# EAGLE board untitled (EAGLE 9.1.2)
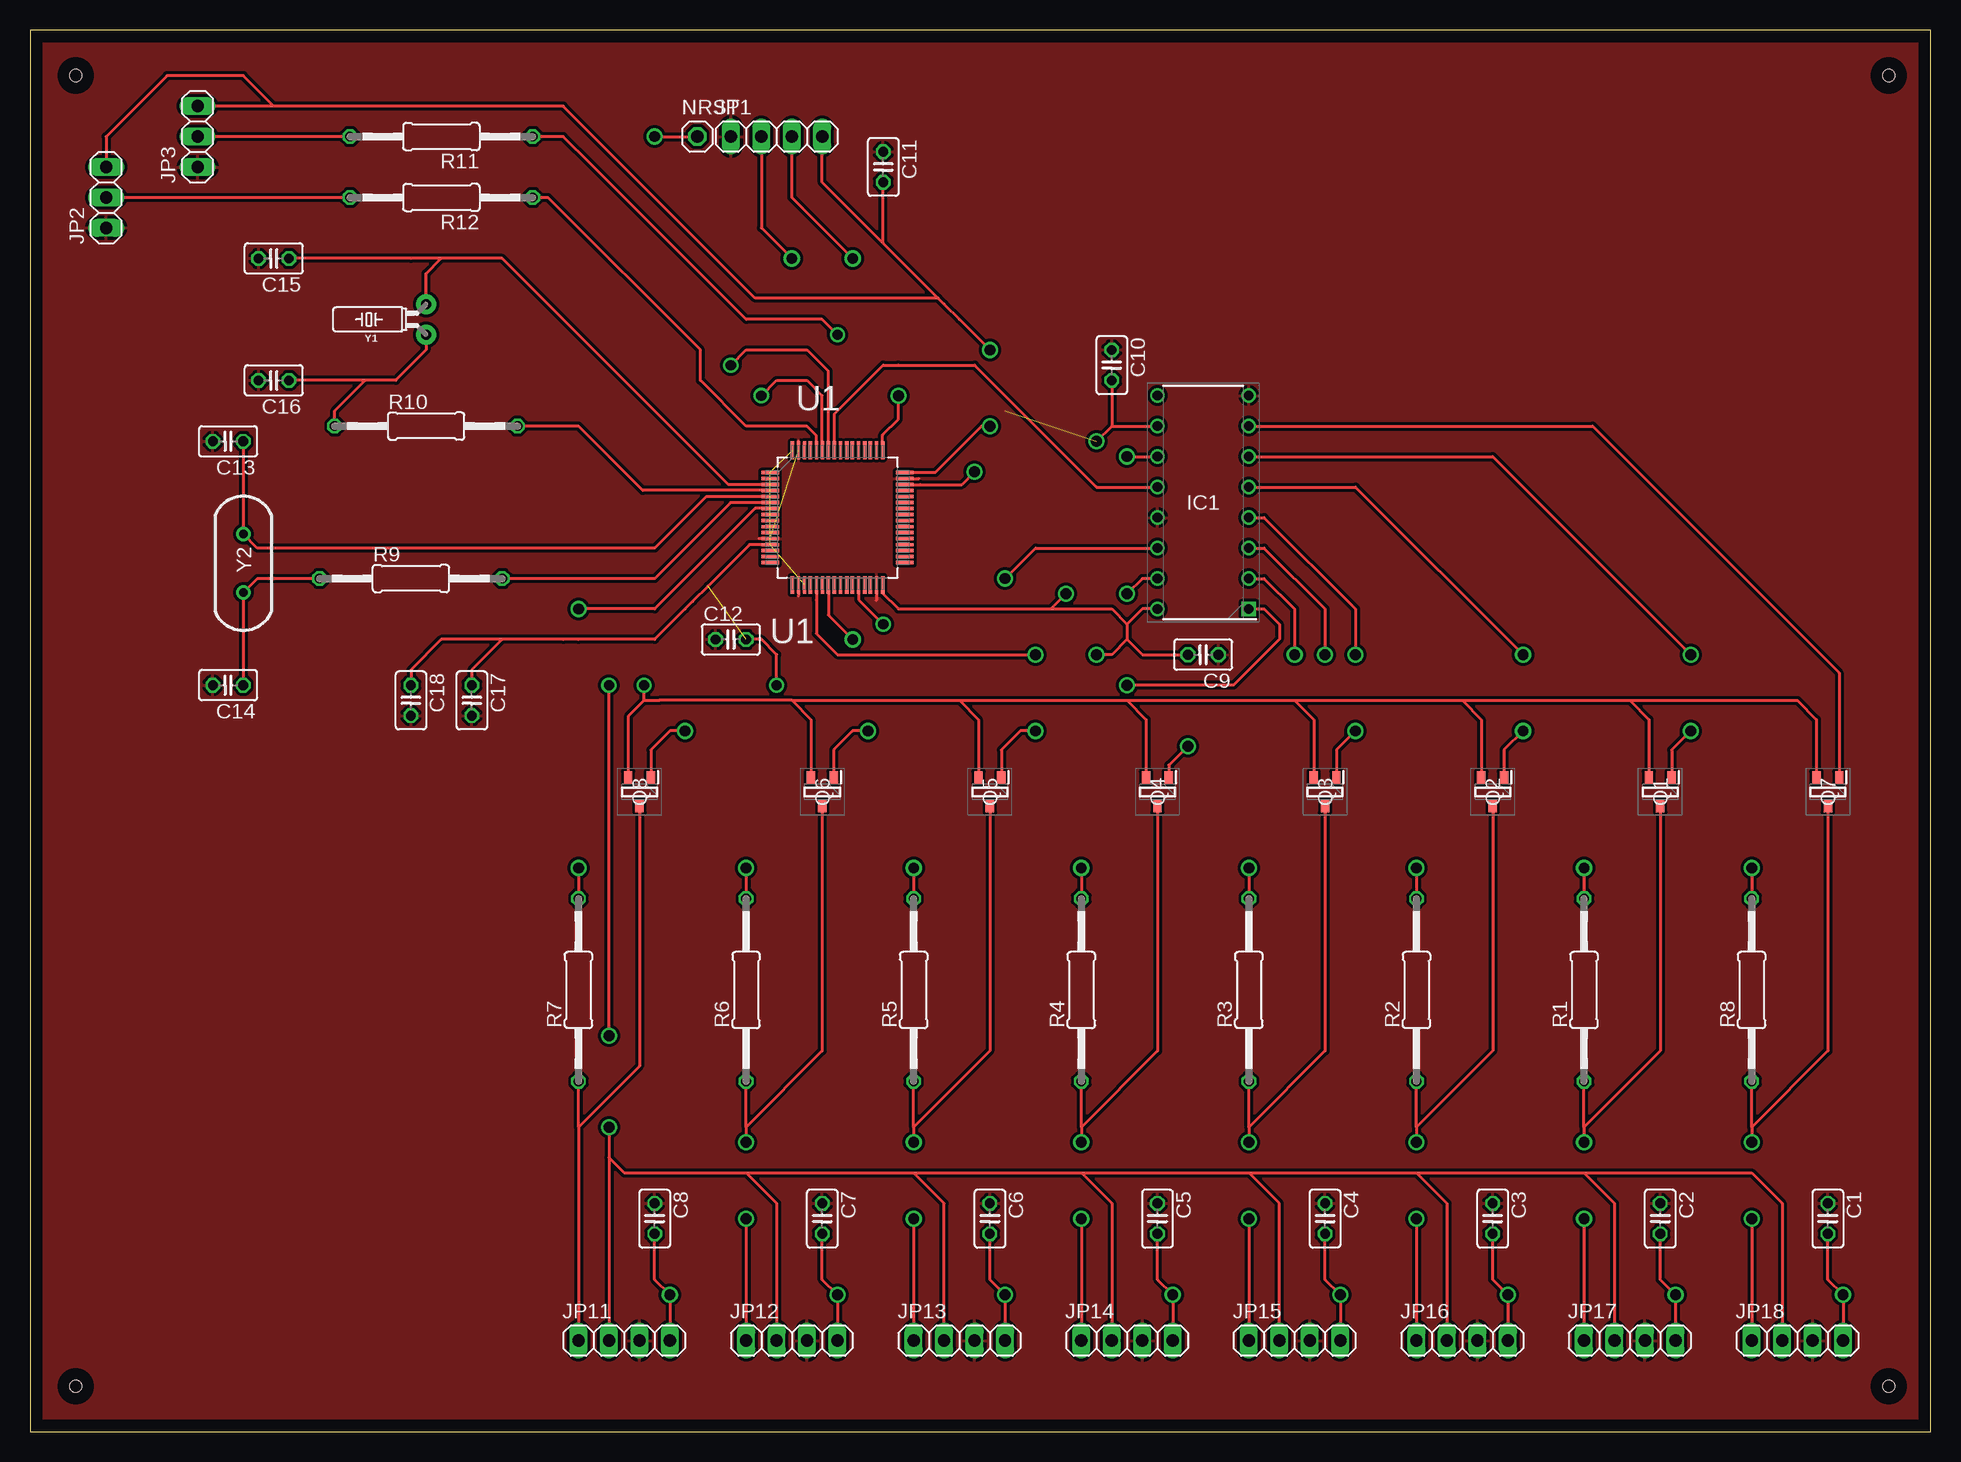
[diagram p0: board, top side]
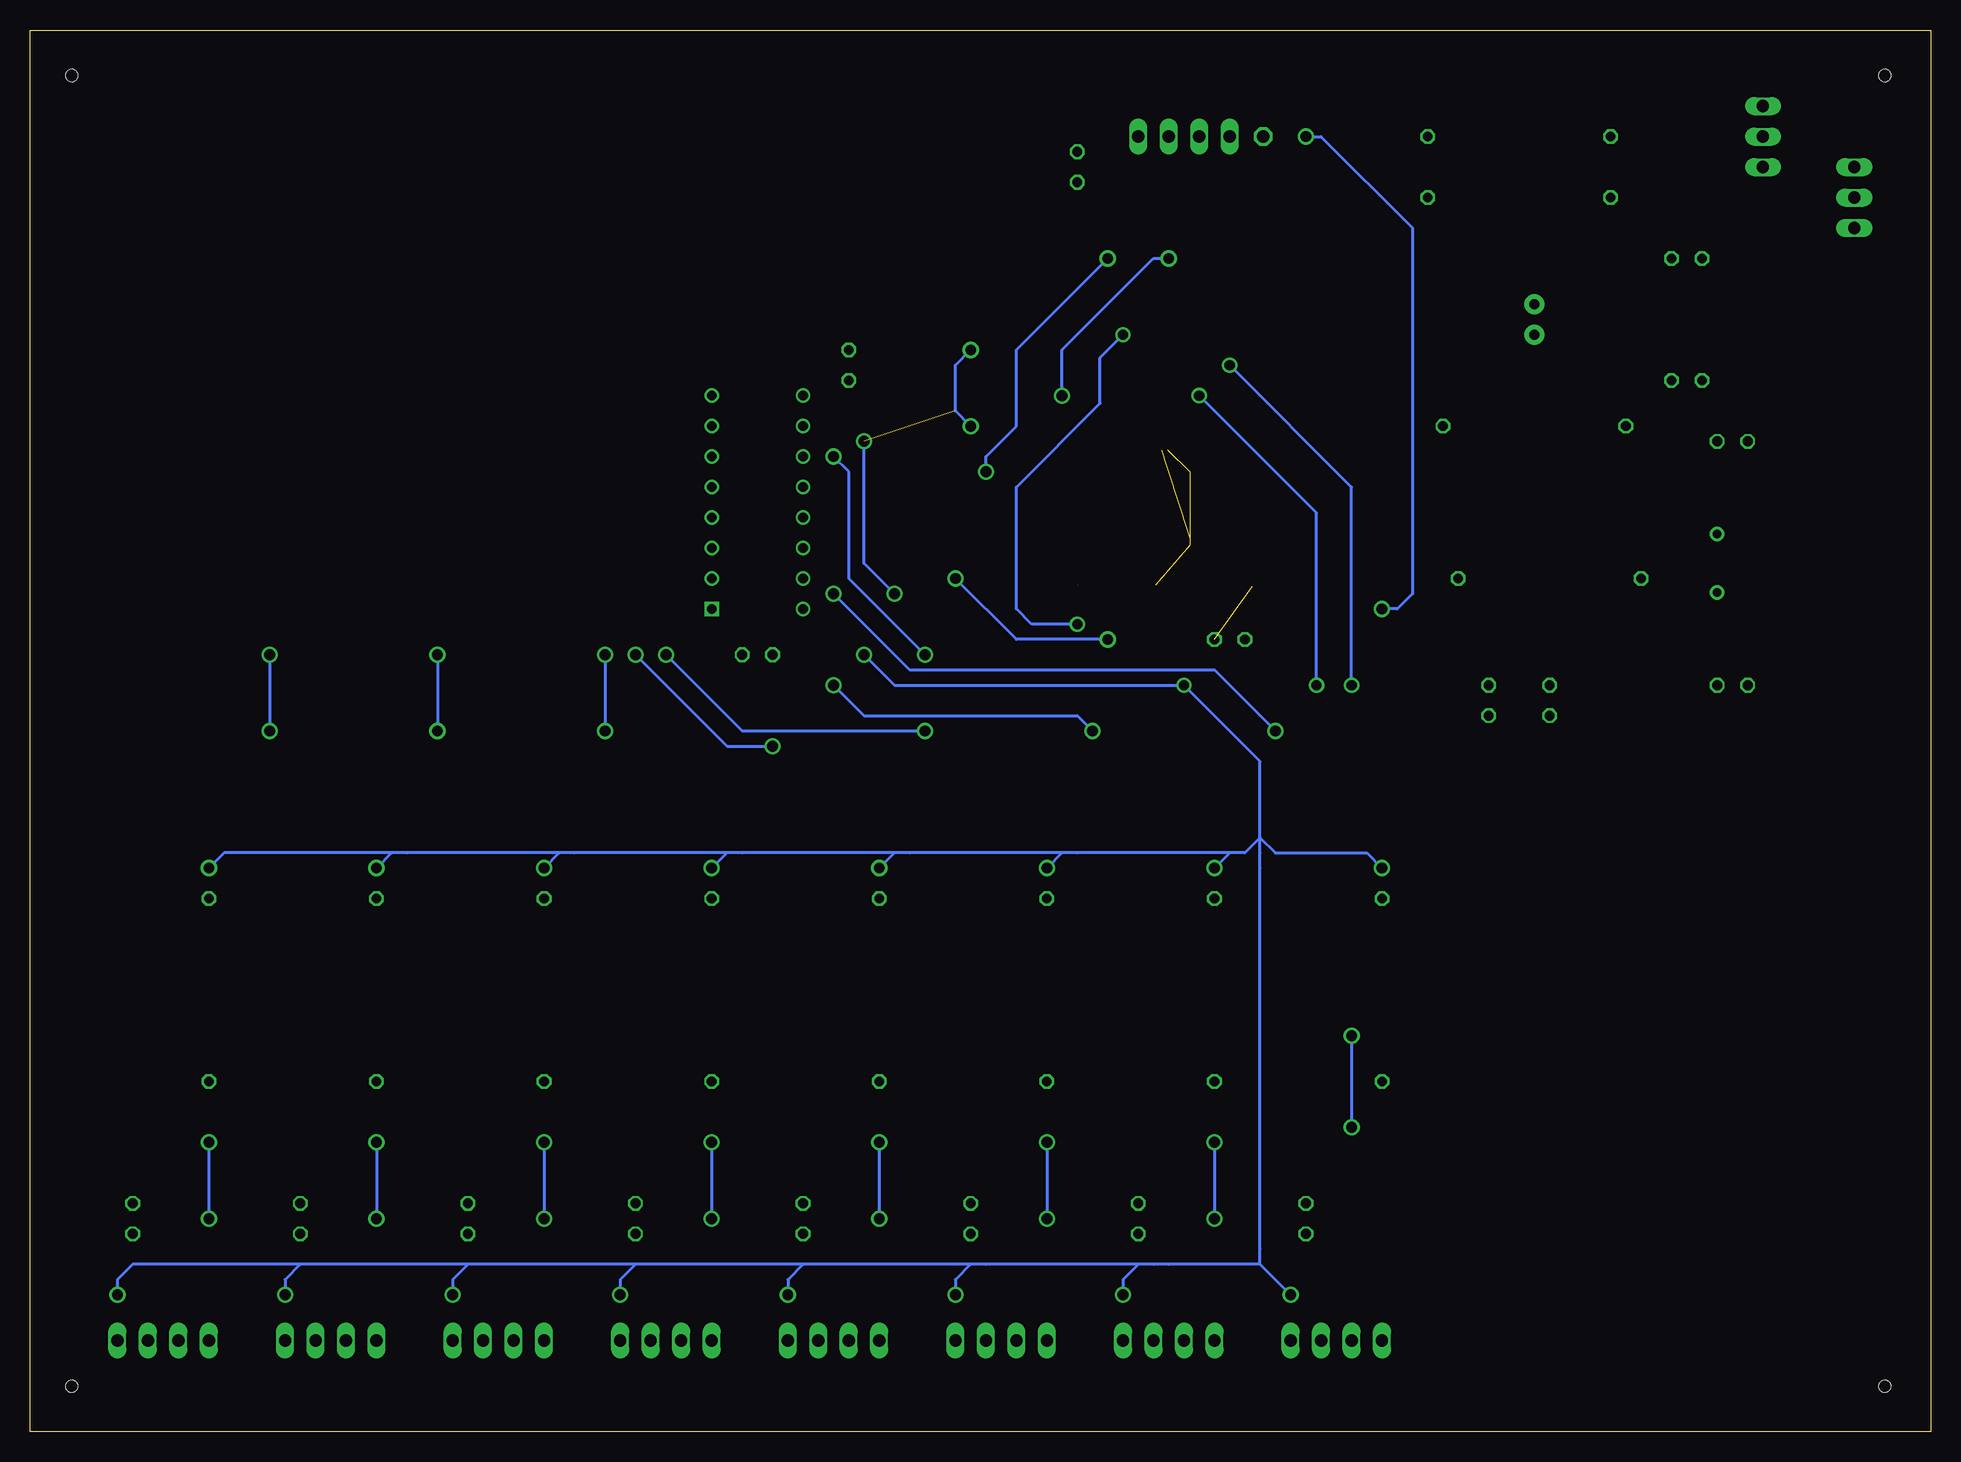
[diagram p1: board, bottom side, seen from below]

Size 158.42 x 116.83 mm. Coordinates in mm from the lower left corner, seen from the top.
Outline: 0,0 158.42,0 158.42,116.83 0,116.83 0,0
Copper layers (1*16): Top 0.035mm / dielectric 1.5mm / Bottom 0.035mm
Design rules "untitled": minimum track width 6mil, minimum drill 0.35mm, track to track 6mil, track to pad 0.152mm, pad to pad 0.152mm, via to via 0.152mm, smd to smd 0.05mm, copper to edge 40mil, drill to drill 6mil, minimum pad ring 0.15mm, minimum via ring 0.15mm, stop-mask expansion 4mil, vias tented up to drill 0mil, thermal gap 10mil
Net classes: 0 default: clearance 0.25 mm
Holes 1 mm at 3.81,113.03 154.94,113.03 154.94,3.81 3.81,3.81

## Footprints (pad centres in the part's own frame; a part is rotated, then mirrored left to right if it is on the bottom)
C025-025X050 = drill 0.813 octagon: 1 -1.27,0; 2 1.27,0
DIP762W60P254L1925H445Q16N = drill 0.8 pad 1.2 square: 1 -3.81,8.89 | drill 0.8 pad 1.2: 2 -3.81,6.35; 3 -3.81,3.81; 4 -3.81,1.27; 5 -3.81,-1.27; 6 -3.81,-3.81; 7 -3.81,-6.35; 8 -3.81,-8.89; 9 3.81,-8.89; 10 3.81,-6.35; 11 3.81,-3.81; 12 3.81,-1.27; 13 3.81,1.27; 14 3.81,3.81; 15 3.81,6.35; 16 3.81,8.89
1X04 = drill 1.016 long: 1 -3.81,0; 2 -1.27,0; 3 1.27,0; 4 3.81,0
1X03 = drill 1.016 long: 1 -2.54,0; 2 0,0; 3 2.54,0
1X01 = drill 1.016 octagon: 1 0,0
SOT95P240X120-3N = smd 1 x 0.7: 1 -1.2,0.95; 2 -1.2,-0.95; 3 1.2,0
0207/15 = drill 0.813 octagon: 1 -7.62,0; 2 7.62,0
QFP50P1200X1200X160-64N = smd 1.473 x 0.279: 1 -5.613,3.759; 2 -5.613,3.251; 3 -5.613,2.743; 4 -5.613,2.261; 5 -5.613,1.753; 6 -5.613,1.245; 7 -5.613,0.762; 8 -5.613,0.254; 9 -5.613,-0.254; 10 -5.613,-0.762; 11 -5.613,-1.245; 12 -5.613,-1.753; 13 -5.613,-2.261; 14 -5.613,-2.743; 15 -5.613,-3.251; 16 -5.613,-3.759; 33 5.613,-3.759; 34 5.613,-3.251; 35 5.613,-2.743; 36 5.613,-2.261; 37 5.613,-1.753; 38 5.613,-1.245; 39 5.613,-0.762; 40 5.613,-0.254; 41 5.613,0.254; 42 5.613,0.762; 43 5.613,1.245; 44 5.613,1.753; 45 5.613,2.261; 46 5.613,2.743; 47 5.613,3.251; 48 5.613,3.759 | smd 0.279 x 1.473: 17 -3.759,-5.613; 18 -3.251,-5.613; 19 -2.743,-5.613; 20 -2.261,-5.613; 21 -1.753,-5.613; 22 -1.245,-5.613; 23 -0.762,-5.613; 24 -0.254,-5.613; 25 0.254,-5.613; 26 0.762,-5.613; 27 1.245,-5.613; 28 1.753,-5.613; 29 2.261,-5.613; 30 2.743,-5.613; 31 3.251,-5.613; 32 3.759,-5.613; 49 3.759,5.613; 50 3.251,5.613; 51 2.743,5.613; 52 2.261,5.613; 53 1.753,5.613; 54 1.245,5.613; 55 0.762,5.613; 56 0.254,5.613; 57 -0.254,5.613; 58 -0.762,5.613; 59 -1.245,5.613; 60 -1.753,5.613; 61 -2.261,5.613; 62 -2.743,5.613; 63 -3.251,5.613; 64 -3.759,5.613
CRYSTAL-PTH-2X6-CYL = drill 0.813 pad 1.676: 1 -1.27,0; 2 1.27,0
IQD-HC-49-4H = drill 0.7 pad 1.2: 1 -2.44,0; 2 2.44,0

## Placement (x,y rotation side)
C1  100nF  [C025-025X050]  149.86,17.78 270 top
C2  100nF  [C025-025X050]  135.89,17.78 270 top
C3  100nF  [C025-025X050]  121.92,17.78 270 top
C4  100nF  [C025-025X050]  107.95,17.78 270 top
C5  100nF  [C025-025X050]  93.98,17.78 270 top
C6  100nF  [C025-025X050]  80.01,17.78 270 top
C7  100nF  [C025-025X050]  66.04,17.78 270 top
C8  100nF  [C025-025X050]  52.07,17.78 270 top
C9  100nF  [C025-025X050]  97.79,64.77 180 top
C10  100nF  [C025-025X050]  90.17,88.9 270 top
C11  100nF  [C025-025X050]  71.12,105.41 270 top
C12  10uF  [C025-025X050]  58.42,66.04 0 top
C13  20 pF  [C025-025X050]  16.51,82.55 180 top
C14  20 pF  [C025-025X050]  16.51,62.23 180 top
C15  10 pF  [C025-025X050]  20.32,97.79 180 top
C16  10 pF  [C025-025X050]  20.32,87.63 180 top
C17  100 nF  [C025-025X050]  36.83,60.96 270 top
C18  1 uF  [C025-025X050]  31.75,60.96 270 top
IC1  TC74HC595AP(F)  [DIP762W60P254L1925H445Q16N]  97.79,77.47 180 top
JP1  [1X04]  62.23,107.95 0 top
JP2  [1X03]  6.35,102.87 90 top
JP3  [1X03]  13.97,107.95 90 top
JP11  [1X04]  49.53,7.62 0 top
JP12  [1X04]  63.5,7.62 0 top
JP13  [1X04]  77.47,7.62 0 top
JP14  [1X04]  91.44,7.62 0 top
JP15  [1X04]  105.41,7.62 0 top
JP16  [1X04]  119.38,7.62 0 top
JP17  [1X04]  133.35,7.62 0 top
JP18  [1X04]  147.32,7.62 0 top
NRST  [1X01]  55.63,107.95 0 top
Q1  BSS138  [SOT95P240X120-3N]  135.89,53.34 270 top
Q2  BSS138  [SOT95P240X120-3N]  121.92,53.34 270 top
Q3  BSS138  [SOT95P240X120-3N]  107.95,53.34 270 top
Q4  BSS138  [SOT95P240X120-3N]  93.98,53.34 270 top
Q5  BSS138  [SOT95P240X120-3N]  80.01,53.34 270 top
Q6  BSS138  [SOT95P240X120-3N]  66.04,53.34 270 top
Q7  BSS138  [SOT95P240X120-3N]  149.86,53.34 270 top
Q8  BSS138  [SOT95P240X120-3N]  50.8,53.34 270 top
R1  1.5k  [0207/15]  129.54,36.83 90 top
R2  1.5k  [0207/15]  115.57,36.83 90 top
R3  1.5k  [0207/15]  101.6,36.83 90 top
R4  1.5k  [0207/15]  87.63,36.83 90 top
R5  1.5k  [0207/15]  73.66,36.83 90 top
R6  1.5k  [0207/15]  59.69,36.83 90 top
R7  1.5k  [0207/15]  45.72,36.83 90 top
R8  1.5k  [0207/15]  143.51,36.83 90 top
R9  390  [0207/15]  31.75,71.12 0 top
R10  0  [0207/15]  33.02,83.82 0 top
R11  10K  [0207/15]  34.29,107.95 180 top
R12  10K  [0207/15]  34.29,102.87 180 top
U1  STM32F103RCT6  [QFP50P1200X1200X160-64N]  67.31,76.2 0 top
Y1  32.768kHz  [CRYSTAL-PTH-2X6-CYL]  33.02,92.71 90 top
Y2  LFXTAL003156  [IQD-HC-49-4H]  17.78,72.39 270 top

## Library data of the parts
C1-C18 = rcl; SPICEPREFIX: C
IC1 = TC74HC595AP(F); DESCRIPTION: IC,CMOS logic,DIP16,SHIFT REGISTERS; HEIGHT: 4.45mm; MANUFACTURER_NAME: Toshiba; MANUFACTURER_PART_NUMBER: TC74HC595AP(F); MOUSER_PART_NUMBER: N/A; MOUSER_PRICE-STOCK: https://www.mouser.com/Search/Refine.aspx?Keyword=N%2FA; RS_PART_NUMBER: 5400095P; RS_PRICE-STOCK: http://au.rs-online.com/web/p/products/5400095P
JP1-JP3 JP11-JP18 NRST = pinhead
Q1-Q8 = BSS138; DESCRIPTION: N-channel MOSFET,BSS138 0.2A 50V; HEIGHT: 1.2mm; MANUFACTURER_NAME: ON Semiconductor; MANUFACTURER_PART_NUMBER: BSS138; MOUSER_PART_NUMBER: 512-BSS138; RS_PART_NUMBER: 1241694; RS_PRICE-STOCK: http://uk.rs-online.com/web/p/products/1241694
R1-R12 = rcl; SPICEPREFIX: R
U1 = STM32F103RCT6; AVAILABILITY: Unavailable; DESCRIPTION: Mainstream Performance line, ARM Cortex-M3 MCU with 256 Kbytes Flash, 72 MHz CPU, motor control, USB and CAN; MF: STMicroelectronics; MP: STM32F103RCT6; PACKAGE: LQFP-64 STMicroelectronics; PRICE: None
Y1 = SparkFun-Clocks; PROD_ID: XTAL-10112
Y2 = LFXTAL003156; ALLIED_NUMBER: R1047051; ALLIED_PRICE-STOCK: https://www.alliedelec.com/iqd-frequency-products-lfxtal003156/R1047051/; DESCRIPTION: Crystal,8.0000MHz,30ppm,30pF,HC49/4H,XTAL003156 8MHZ; HEIGHT: mm; MANUFACTURER_NAME: IQD; MANUFACTURER_PART_NUMBER: LFXTAL003156; RS_PART_NUMBER: 1533666; RS_PRICE-STOCK: http://uk.rs-online.com/web/p/products/1533666

## Nets
BOOT0: R12.1 U1.60
BOOT0_10K: JP2.2 R12.2
BOOT1: R11.1 U1.28
BOOT1_10K: JP3.2 R11.2
CLK: JP11.2 JP12.2 JP13.2 JP14.2 JP15.2 JP16.2 JP17.2 JP18.2 U1.58
GND: C1.1 C2.1 C3.1 C4.1 C5.1 C6.1 C7.1 C8.1 C9.1 C10.1 C11.1 C12.1 C13.2 C14.2 C15.2 C16.2 C17.2 C18.2 IC1.8 IC1.13 JP1.1 JP2.1 JP3.1 JP11.3 JP12.3 JP13.3 JP14.3 JP15.3 JP16.3 JP17.3 JP18.3 U1.12 U1.18 U1.31 U1.47 U1.63
HSE_OSC_IN: C13.1 U1.5 Y2.1
HSE_OSC_OUT: R9.2 U1.6
HSE_OSC_OUT_2: C14.1 R9.1 Y2.2
LSE_OSC_IN: C15.1 U1.3 Y1.2
LSE_OSC_OUT: R10.2 U1.4
LSE_OSC_OUT_2: C16.1 R10.1 Y1.1
NRST: NRST.1 U1.7
OUT0: JP18.1 Q7.3 R8.1
OUT1: JP17.1 Q1.3 R1.1
OUT2: JP16.1 Q2.3 R2.1
OUT3: JP15.1 Q3.3 R3.1
OUT4: JP14.1 Q4.3 R4.1
OUT5: JP13.1 Q5.3 R5.1
OUT6: JP12.1 Q6.3 R6.1
OUT7: JP11.1 Q8.3 R7.1
QA: IC1.15 Q8.1
QB: IC1.1 Q6.1
QC: IC1.2 Q5.1
QD: IC1.3 Q4.1
QE: IC1.4 Q3.1
QF: IC1.5 Q2.1
QG: IC1.6 Q1.1
QH: IC1.7 Q7.1
RCK: IC1.12 U1.57
SCK: IC1.11 U1.21
SDA: Q1.2 Q2.2 Q3.2 Q4.2 Q5.2 Q6.2 Q7.2 Q8.2 U1.59
SI: IC1.14 U1.23
SWCLK: JP1.2 U1.49
SWDIO: JP1.3 U1.46
VCC: C1.2 C2.2 C3.2 C4.2 C5.2 C6.2 C7.2 C8.2 C9.2 C10.2 C11.2 C12.2 C17.1 C18.1 IC1.10 IC1.16 JP1.4 JP2.3 JP3.3 JP11.4 JP12.4 JP13.4 JP14.4 JP15.4 JP16.4 JP17.4 JP18.4 R1.2 R2.2 R3.2 R4.2 R5.2 R6.2 R7.2 R8.2 U1.1 U1.13 U1.19 U1.32 U1.48 U1.64

## Tracks (layer width: path | path; a pad name or v marks a point on that pad's centre or on a via)
BOOT0
  Top 0.254: U1.60 65.56,83.03 64.77,83.82 59.69,83.82 55.88,87.63 55.88,90.17 43.18,102.87 R12.1
BOOT0_10K
  Top 0.254: R12.2 JP2.2
BOOT1  (via drill 0.85)
  Top 0.254: U1.28 69.06,69.37 v71.12,67.31 | R11.1 44.45,107.95 46.77,105.63 59.69,92.71 66.04,92.71 v67.31,91.44
  Bottom 0.254: v71.12,67.31 74.93,67.31 76.2,68.58 76.2,78.74 69.22,85.72 69.22,89.53 v67.31,91.44
BOOT1_10K
  Top 0.254: R11.2 JP3.2
CLK  (via drill 0.85, 0.9)
  Top 0.254: U1.58 66.55,88.39 64.77,90.17 59.69,90.17 v58.42,88.9 | 48.26,22.86 48.26,10.16 JP11.2 | 48.26,22.86 49.53,21.59 53.34,21.59 59.69,21.59 | 59.69,21.59 62.23,19.05 JP12.2 | 73.66,21.59 67.31,21.59 59.69,21.59 | 101.6,21.59 95.25,21.59 87.63,21.59 | 101.6,21.59 114.3,21.59 115.57,21.59 | 115.57,21.59 116.84,21.59 123.19,21.59 129.54,21.59 | JP18.2 146.05,19.05 143.51,21.59 129.54,21.59 | JP13.2 76.2,19.05 73.66,21.59 | 87.63,21.59 90.17,19.05 JP14.2 | JP15.2 104.14,19.05 101.6,21.59 | 115.57,21.59 118.11,19.05 JP16.2 | 129.54,21.59 132.08,19.05 JP17.2 | 73.66,21.59 81.28,21.59 87.63,21.59 | v48.26,25.4 48.26,22.86 | v48.26,33.02 v48.26,62.23
  Bottom 0.254: v48.26,33.02 v48.26,25.4 | v48.26,62.23 48.26,78.74 v58.42,88.9
GND  (1 unrouted)
  Top 0.254: U1.31 70.56,69.29 | U1.63 64.06,82.6 | U1.47 74.09,79.45 | U1.18 64.06,69.67 | U1.12 60.73,74.45
  pour Top: -25.4,139.7 -25.4,-27.94 369.57,-27.94 190.5,151.13 -13.97,151.13
HSE_OSC_IN
  Top 0.254: U1.5 56.36,77.95 52.07,73.66 18.95,73.66 Y2.1 C13.1
HSE_OSC_OUT
  Top 0.254: U1.6 58.4,77.44 52.07,71.12 R9.2
HSE_OSC_OUT_2
  Top 0.254: R9.1 18.95,71.12 Y2.2 C14.1
LSE_OSC_IN
  Top 0.254: U1.3 58.22,78.94 39.37,97.79 34.29,97.79 | 34.29,97.79 31.75,97.79 C15.1 | Y1.2 33.02,96.52 34.29,97.79
LSE_OSC_OUT
  Top 0.254: U1.4 51.08,78.46 45.72,83.82 R10.2
LSE_OSC_OUT_2
  Top 0.254: 27.94,87.63 C16.1 | 27.94,87.63 25.4,85.09 R10.1 | Y1.1 33.02,90.17 30.48,87.63 27.94,87.63
NRST  (via drill 0.9)
  Top 0.254: U1.7 60.45,76.96 52.07,68.58 v45.72,68.58 | v52.07,107.95 NRST.1
  Bottom 0.254: v45.72,68.58 44.45,68.58 43.18,69.85 43.18,100.33 50.8,107.95 v52.07,107.95
OUT0  (via drill 0.9)
  Top 0.254: Q7.3 149.86,31.75 143.51,25.4 | 143.51,25.4 R8.1 | 143.51,25.4 v143.51,24.13 | v143.51,17.78 JP18.1
  Bottom 0.254: v143.51,24.13 v143.51,17.78
OUT1  (via drill 0.9)
  Top 0.254: Q1.3 135.89,31.75 129.54,25.4 | 129.54,25.4 R1.1 | 129.54,25.4 v129.54,24.13 | v129.54,17.78 JP17.1
  Bottom 0.254: v129.54,24.13 v129.54,17.78
OUT2  (via drill 0.9)
  Top 0.254: Q2.3 121.92,31.75 116.84,26.67 115.57,25.4 | 115.57,25.4 R2.1 | 115.57,25.4 v115.57,24.13 | v115.57,17.78 JP16.1
  Bottom 0.254: v115.57,24.13 v115.57,17.78
OUT3  (via drill 0.9)
  Top 0.254: Q3.3 107.95,31.75 101.6,25.4 | 101.6,25.4 R3.1 | 101.6,25.4 v101.6,24.13 | v101.6,17.78 JP15.1
  Bottom 0.254: v101.6,24.13 v101.6,17.78
OUT4  (via drill 0.9)
  Top 0.254: Q4.3 93.98,31.75 87.63,25.4 | 87.63,25.4 R4.1 | 87.63,25.4 v87.63,24.13 | v87.63,17.78 JP14.1
  Bottom 0.254: v87.63,24.13 v87.63,17.78
OUT5  (via drill 0.9)
  Top 0.254: Q5.3 80.01,31.75 73.66,25.4 | 73.66,25.4 R5.1 | 73.66,25.4 v73.66,24.13 | v73.66,17.78 JP13.1
  Bottom 0.254: v73.66,24.13 v73.66,17.78
OUT6  (via drill 0.9)
  Top 0.254: Q6.3 66.04,31.75 59.69,25.4 | 59.69,25.4 R6.1 | 59.69,25.4 v59.69,24.13 | v59.69,17.78 JP12.1
  Bottom 0.254: v59.69,24.13 v59.69,17.78
OUT7
  Top 0.254: Q8.3 50.8,30.48 45.72,25.4 | 45.72,25.4 R7.1 | 45.72,25.4 JP11.1
QA  (via drill 0.9)
  Top 0.254: IC1.15 92.71,71.12 v91.44,69.85 | Q8.1 51.75,56.83 53.34,58.42 v54.61,58.42
  Bottom 0.254: v91.44,69.85 85.09,63.5 59.69,63.5 v54.61,58.42
QB  (via drill 0.9)
  Top 0.254: IC1.1 102.87,68.58 104.14,67.31 104.14,66.04 100.33,62.23 v91.44,62.23 | Q6.1 66.99,56.83 68.58,58.42 v69.85,58.42
  Bottom 0.254: v91.44,62.23 88.9,59.69 71.12,59.69 v69.85,58.42
QC  (via drill 0.9)
  Top 0.254: IC1.2 102.87,71.12 105.41,68.58 v105.41,64.77 | Q5.1 80.96,56.83 82.55,58.42 v83.82,58.42
  Bottom 0.254: v105.41,64.77 99.06,58.42 v83.82,58.42
QD  (via drill 0.9)
  Top 0.254: IC1.3 102.87,73.66 107.95,68.58 v107.95,64.77 | v96.52,57.15 94.93,55.56 Q4.1
  Bottom 0.254: v107.95,64.77 100.33,57.15 v96.52,57.15
QE  (via drill 0.9)
  Top 0.254: IC1.4 102.87,76.2 110.49,68.58 v110.49,64.77 | v110.49,58.42 108.9,56.83 Q3.1
  Bottom 0.254: v110.49,64.77 v110.49,58.42
QF  (via drill 0.9)
  Top 0.254: v124.46,64.77 110.49,78.74 IC1.5 | v124.46,58.42 122.87,56.83 Q2.1
  Bottom 0.254: v124.46,64.77 v124.46,58.42
QG  (via drill 0.9)
  Top 0.254: IC1.6 121.92,81.28 v138.43,64.77 | v138.43,58.42 136.84,56.83 Q1.1
  Bottom 0.254: v138.43,64.77 v138.43,58.42
QH
  Top 0.254: IC1.7 130.25,83.82 150.81,63.26 Q7.1
RCK
  Top 0.254: U1.57 67.06,84.84 71.12,88.9 72.39,88.9 78.74,88.9 88.9,78.74 IC1.12
SCK  (via drill 0.9)
  Top 0.254: v83.82,64.77 67.31,64.77 65.56,66.52 65.56,69.32 U1.21 | v91.44,81.28 IC1.11
  Bottom 0.254: v83.82,64.77 90.17,71.12 90.17,80.01 v91.44,81.28
SDA  (via drill 0.85)
  Top 0.254: 63.5,60.96 77.47,60.96 | 77.47,60.96 91.44,60.96 | 91.44,60.96 105.41,60.96 | 105.41,60.96 119.38,60.96 | 119.38,60.96 133.35,60.96 | 133.35,60.96 147.32,60.96 148.91,59.37 Q7.2 | Q6.2 65.09,59.37 63.5,60.96 | Q8.2 49.91,54.6 49.91,59.69 51.18,60.96 | Q4.2 93.03,59.37 91.44,60.96 | Q3.2 107,59.37 105.41,60.96 | Q2.2 120.97,59.37 119.38,60.96 | Q1.2 134.94,59.37 133.35,60.96 | Q5.2 79.06,59.37 77.47,60.96 | U1.59 66.04,81.84 66.04,86.36 64.77,87.63 62.23,87.63 v60.96,86.36 | 63.5,60.96 52.45,60.96 51.18,60.96 | 51.18,60.96 v51.18,62.23
  Bottom 0.254: v51.18,62.23 51.18,76.58 v60.96,86.36
SI  (via drill 0.9)
  Top 0.254: U1.23 66.55,68.07 v68.58,66.04 | v81.28,71.12 83.82,73.66 IC1.14
  Bottom 0.254: v68.58,66.04 76.2,66.04 v81.28,71.12
SWCLK  (via drill 0.9)
  Top 0.254: v72.39,86.36 72.39,84.4 71.07,83.08 U1.49 | JP1.2 60.96,100.33 v63.5,97.79
  Bottom 0.254: v72.39,86.36 72.39,90.17 64.77,97.79 v63.5,97.79
SWDIO  (via drill 0.9)
  Top 0.254: v78.74,80.01 77.67,78.94 74.19,78.94 U1.46 | v68.58,97.79 63.5,102.87 JP1.3
  Bottom 0.254: v78.74,80.01 78.74,81.28 76.2,83.82 76.2,90.17 v68.58,97.79
VCC  (via drill 0.85, 0.9)  (6 unrouted)
  Top 0.254: 85.09,68.58 72.39,68.58 71.08,69.89 U1.32 | 85.09,68.58 v86.36,69.85 | v88.9,82.55 90.17,83.82 | 91.44,66.04 90.17,64.77 v88.9,64.77 | v45.72,46.99 R7.2 | v59.69,46.99 R6.2 | v73.66,46.99 R5.2 | v87.63,46.99 R4.2 | v101.6,46.99 R3.2 | v115.57,46.99 R2.2 | v129.54,46.99 R1.2 | v143.51,46.99 R8.2 | 71.12,99.06 C11.2 | v80.01,83.82 79.32,83.82 78.4,82.89 75.46,79.96 U1.48 | 71.12,99.06 66.04,104.14 JP1.4 | 90.17,83.82 IC1.10 | IC1.16 92.71,68.58 91.44,67.31 | 76.2,93.98 77.47,92.71 v80.01,90.17 | C10.2 90.17,83.82 | 91.44,66.04 92.71,64.77 C9.2 | JP11.4 v53.34,11.43 52.07,12.7 C8.2 | JP12.4 v67.31,11.43 66.04,12.7 C7.2 | JP13.4 v81.28,11.43 80.01,12.7 C6.2 | JP14.4 v95.25,11.43 93.98,12.7 C5.2 | JP15.4 v109.22,11.43 107.95,12.7 C4.2 | JP16.4 v123.19,11.43 121.92,12.7 C3.2 | JP17.4 v137.16,11.43 135.89,12.7 C2.2 | JP18.4 v151.13,11.43 149.86,12.7 C1.2 | U1.13 59.97,73.94 56.52,70.48 55.25,69.22 54.61,68.58 52.07,66.04 45.72,66.04 44.45,66.04 39.37,66.04 | 39.37,66.04 34.29,66.04 31.75,63.5 C18.1 | 39.37,66.04 36.83,63.5 C17.1 | 20.32,110.49 21.59,110.49 44.45,110.49 60.46,94.48 75.7,94.48 76.2,93.98 | JP3.3 17.78,110.49 20.32,110.49 | JP2.3 6.35,107.95 11.43,113.03 17.78,113.03 20.32,110.49 | 71.12,99.06 76.2,93.98 | 85.09,68.58 86.36,68.58 | 86.36,68.58 87.63,68.58 | 91.44,67.31 91.44,66.04 | 86.36,68.58 90.17,68.58 91.44,67.31 | v62.23,62.23 62.23,64.77 60.96,66.04 C12.2
  Bottom 0.254: v86.36,69.85 88.9,72.39 v88.9,82.55 | 93.98,13.97 95.25,12.7 v95.25,11.43 | 93.98,13.97 107.95,13.97 | 107.95,13.97 109.22,12.7 v109.22,11.43 | 107.95,13.97 121.92,13.97 | 121.92,13.97 123.19,12.7 v123.19,11.43 | 121.92,13.97 135.89,13.97 | 135.89,13.97 137.16,12.7 v137.16,11.43 | 135.89,13.97 149.86,13.97 151.13,12.7 v151.13,11.43 | 55.88,13.97 63.5,13.97 64.77,13.97 66.04,13.97 | 80.01,13.97 93.98,13.97 | 66.04,13.97 67.31,12.7 v67.31,11.43 | 80.01,13.97 81.28,12.7 v81.28,11.43 | 55.88,49.53 55.88,55.88 v62.23,62.23 86.36,62.23 v88.9,64.77 | 55.88,49.53 54.61,48.26 46.99,48.26 v45.72,46.99 | 55.88,49.53 57.15,48.26 58.42,48.26 | 58.42,48.26 71.12,48.26 | 71.12,48.26 85.09,48.26 86.36,48.26 | 86.36,48.26 99.06,48.26 100.33,48.26 | 100.33,48.26 113.03,48.26 114.3,48.26 | 114.3,48.26 127,48.26 128.27,48.26 | 128.27,48.26 142.24,48.26 v143.51,46.99 | 55.88,49.53 55.88,48.26 55.88,46.99 55.88,15.24 55.88,13.97 | 58.42,48.26 v59.69,46.99 | 71.12,48.26 72.39,48.26 v73.66,46.99 | 86.36,48.26 v87.63,46.99 | 100.33,48.26 v101.6,46.99 | 114.3,48.26 v115.57,46.99 | 128.27,48.26 v129.54,46.99 | v80.01,83.82 81.28,85.09 81.28,88.9 v80.01,90.17 | 55.88,13.97 v53.34,11.43 | 66.04,13.97 78.74,13.97 80.01,13.97